# Altium PCB SonRegülatorPCB.PcbDoc
Units mm, origin at the board's own origin, x right, y up, seen from the top; angles counter-clockwise.
Board outline 50.2 x 29.92 mm, 2 copper layers (Top Layer, Bottom Layer); 4 components, 6 nets, 18 pads, 0 vias.
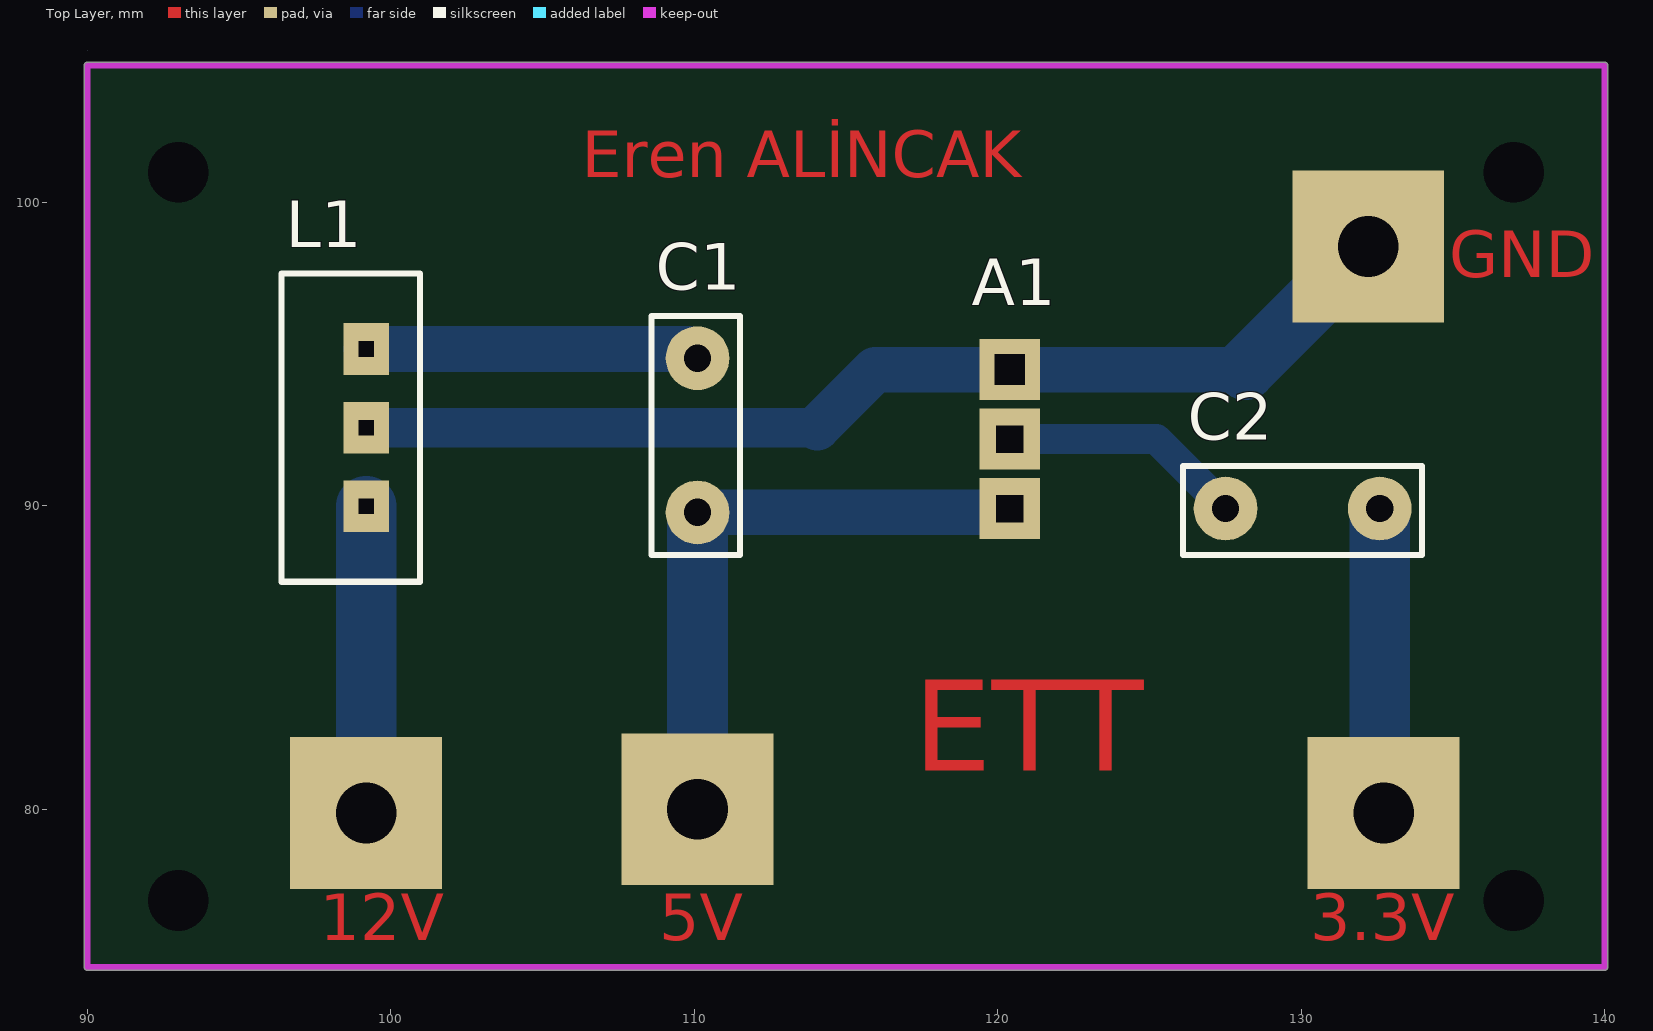
[diagram p0: Top Layer view]
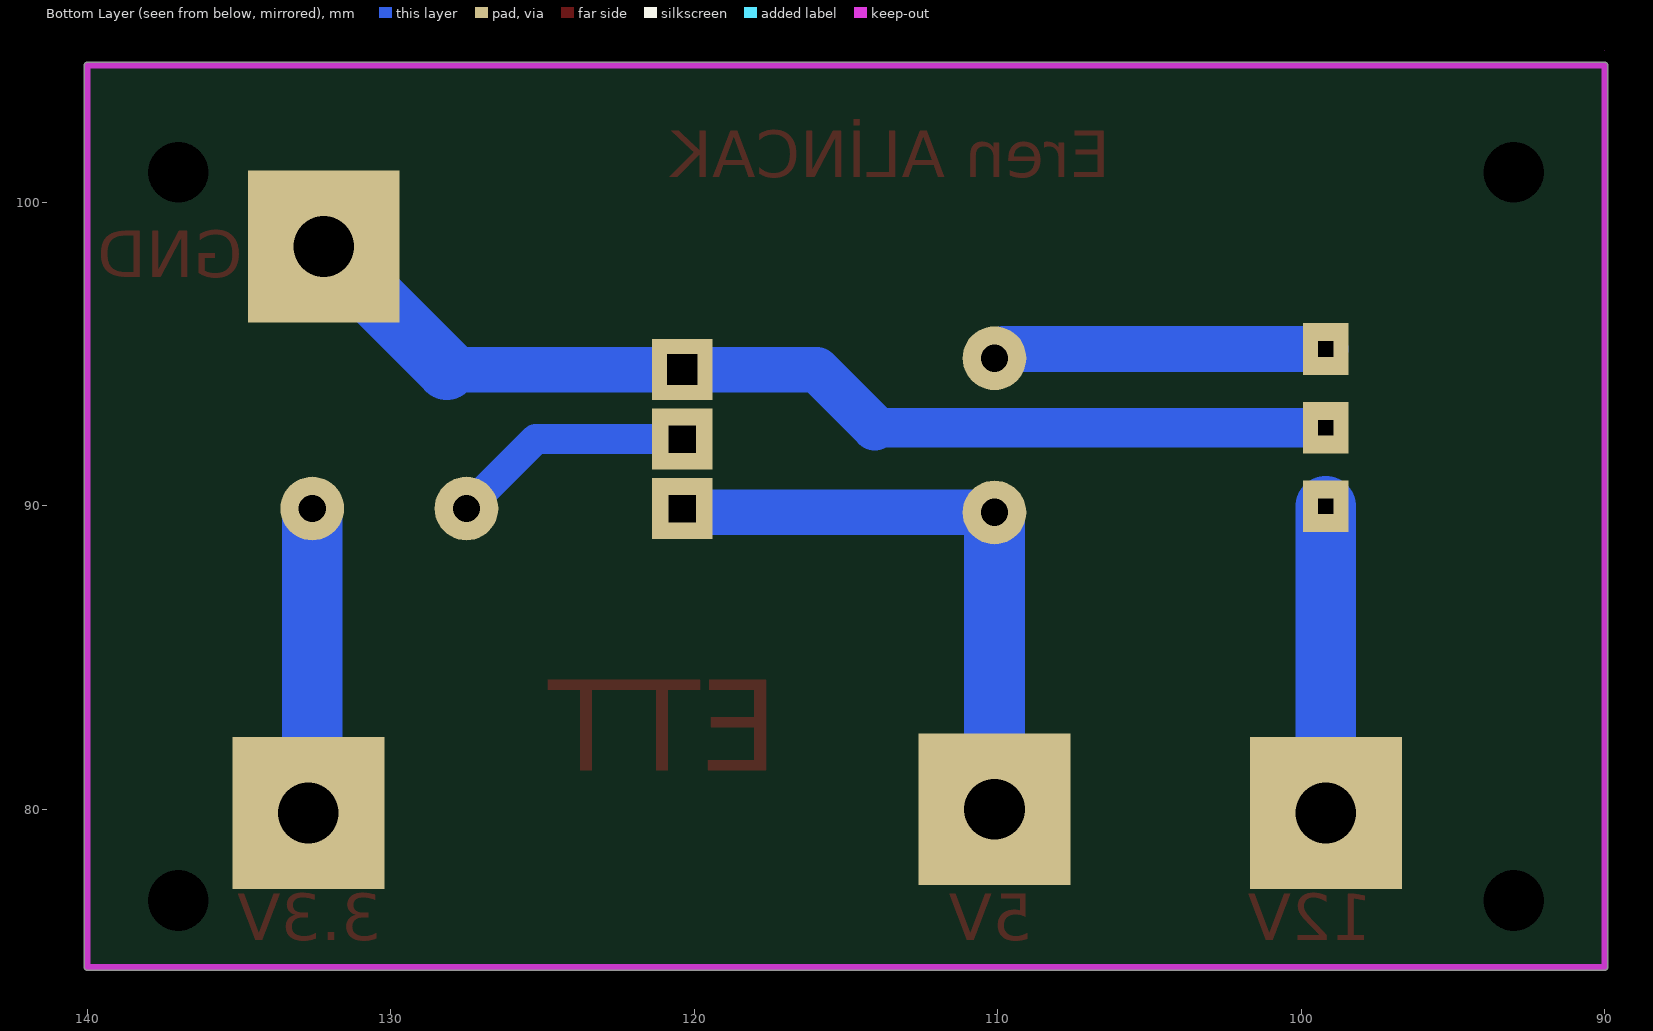
[diagram p1: Bottom Layer view, seen from below]
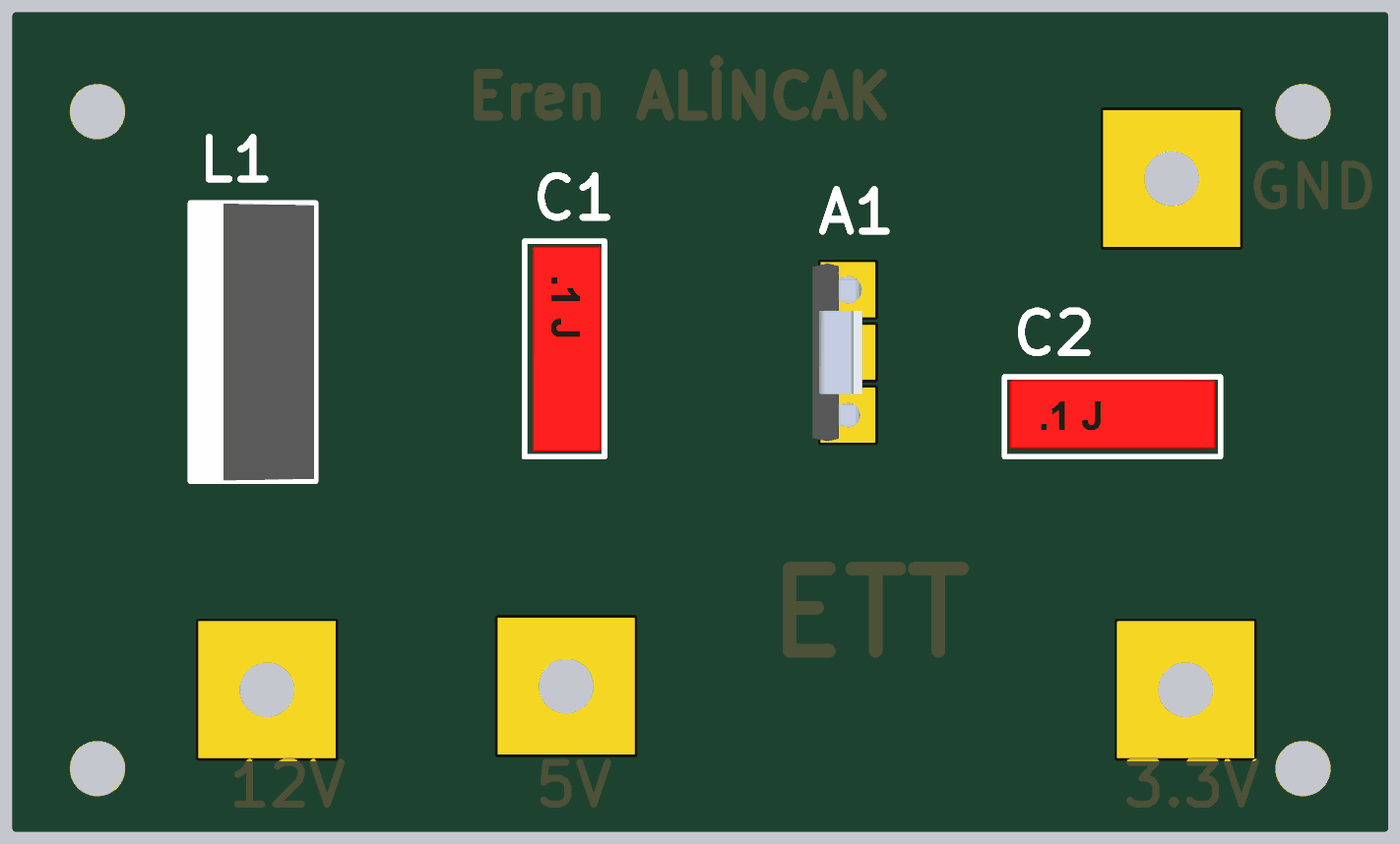
[diagram p2: 3D render of the assembled board from above, using the file's embedded part models]

## Layer stack, top to bottom
Top Solder: solder mask 0.0102, Solder Resist, Dk 3.5
Top Layer: signal copper 0.0356
Dielectric 1: dielectric 0.32, FR-4, Dk 4.8
Bottom Layer: signal copper 0.0356
Bottom Solder: solder mask 0.0102, Solder Resist, Dk 3.5

## Board outline
89.9,74.803 ccw(c90,74.803) 90,74.703 140,74.703 ccw(c140,74.803) 140.1,74.803 140.1,104.521 ccw(c140,104.521) 140,104.621 90,104.621 ccw(c90,104.521) 89.9,104.521
cut-out: 90,105

## Design rules (kind name [scope] priority, off if disabled: settings)
Clearance [All] p1: gap=0.254 ignorepadtopadclearanceinfootprint=FALSE except(0: Arc-Hole Track-Hole SMDPad-Hole THPad-Hole Via-Hole Fill-Hole Poly-Hole Region-Hole Text-Hole)
PolygonConnect [All] p1: connectstyle=Relief reliefconductorwidth=0.254 reliefentries=4 polygonreliefangle="90 Angle" airgapwidth=0.254
RoutingVias [All] p1: holewidth=0.711 width=1.27 viastyle="Through Hole" minholewidth=0.711 minwidth=1.27 maxholewidth=0.711 maxwidth=1.27
SolderMaskExpansion [All] p1: expansion=0.102
Width [All] p1: maxlimit=1000 minlimit=0.254 preferedwidth=1
30 further rules are at their usual default settings.

## Components (designator, comment, footprint, x,y, rotation, side; value= is the part's Value field where it differs from the comment)
A1 "AMSRegülatör" AMS1117-3,3 120.396,92.206 r270 top
C1 "Cap" Cap1 110.109,94.869 r270 top
C2 "Cap" Cap1 127.508,89.916 r0 top
L1 "LMRegülatör" LM7805 99.187,92.583 r90 top

## Footprints (in the part's own frame and the unit in brackets; to place one, negate y for a bottom-side part, rotate by r counter-clockwise, add the part's x,y. Pads: shape width x height; smd on the part's side, far side on the other; paste and mask are expansions set on the pad)
AMS1117-3,3 [mm]
  rect 2x2 hole 0.89 square: +(2.29,0) -(0,0)
  rect 2x2 hole 1 square: GND(-2.29,0)
  body extent -3.25,-1.3 3.25,0.51, height 6.1
Cap1 [mm] "100nF"
  round 2.1 hole 0.9: 1(0,0) 2(5.08,0)
  silkscreen extent -1.4,-1.52 6.48,1.4, body extent -1.21,-1.23 6.29,1.27, height 8.6
LM7805 [mm]
  rect 1.7x1.5 hole 0.5 square: +(-2.59,0) -(2.59,0) GND(0,0)
  silkscreen extent -5.08,-1.78 5.08,2.79, body extent -5.08,-1.71 5.08,2.86, height 22.34

## Part data
A1: library part AMS1117-3.3, "Crimper, Wire Special For 16740", Manufacturer="Advanced Monolithic Systems", Manufacturer Part Number=AMS1117-3.3, Pricing 1="1=0.1869, 10=0.135, 30=0.1256, 100=0.1163, 500=0.11, 1000=0.109, 1=0.1712, 10=0.1236, 30=0.115, 100=0.1065, 500=0.1008, 1000=0.0998, 1=0.8475, 10=0.612, 30=0.5697, 100=0.5272, 500=0.499, 1000=0.4943, 1=0.8153, 10=0.5888, 30=0.548, 100=0.5071, 500=0.48, 1000=0.4755, 1=0.1082, 10=0.0781, 30=0.0727, 100=0.0673, 500=0.0637, 1000=0.0631, 1=0.096, 10=0.0693, 30=0.0645, 100=0.0597, 500=0.0565, 1000=0.056, 1=0.9316, 10=0.6727, 30=0.6261, 100=0.5795, 500=0.5485, 1000=0.5433, 1=12.8319, 10=9.2663, 30=8.6249, 100=7.9818, 500=7.5548, 1000=7.4834, 1=0.5157, 10=0.3724, 30=0.3466, 100=0.3208, 500=0.3036, 1000=0.3008, 1=9.0461, 10=6.5324, 30=6.0803, 100=5.6269, 500=5.3259, 1000=5.2756, 1=1.181, 10=0.8528, 30=0.7938, 100=0.7346, 500=0.6953, 1000=0.6887, 1=0.1699, 10=0.1227, 30=0.1142, 100=0.1057, 500=0.1, 1000=0.0991, 1=0.12, 10=0.08666, 30=0.08066, 100=0.07465, 500=0.07065, 1000=0.06998 (AUD)", Stock 1=596858, Supplier 1=LCSC
C1 C2: library part R82DC3100DQ50J, "CAPACITOR POLY FILM FILM 0.1UF, 5%, 63V,", Capacitance=100nF, Case/Package=Radial, Dielectric=PET, Manufacturer=KEMET, Max Operating Temperature=105°C, Min Operating Temperature=-55°C, Package Quantity=3500, Tolerance=5%, Voltage=63V, Voltage Rating (AC)=40V, ComponentLink1Description=http://uk.rs-online.com/webdocs/1515/0900766b815154ac.pdf?src-supplier=RSComponents, ComponentLink1URL=http://uk.rs-online.com/webdocs/1515/0900766b815154ac.pdf?src-supplier=RSComponents, ComponentLink2Description=https://www.verical.com/server-webapp/html/getDatasheet?partID=151946&src-supplier=Verical, ComponentLink2URL=https://www.verical.com/server-webapp/html/getDatasheet?partID=151946&src-supplier=Verical, ComponentLink3Description=http://www.mouser.com/ds/2/212/KEM_F3101_R82-1103738.pdf?src-supplier=Mouser, ComponentLink3URL=http://www.mouser.com/ds/2/212/KEM_F3101_R82-1103738.pdf?src-supplier=Mouser, ComponentLink4Description=https://www.alliedelec.com/m/d/c7abfacc3ab5460f71cee4e24a650bb0.pdf?src-supplier=Allied+Electronics, ComponentLink4URL=https://www.alliedelec.com/m/d/c7abfacc3ab5460f71cee4e24a650bb0.pdf?src-supplier=Allied+Electronics, ComponentLink5Description=http://www.farnell.com/datasheets/1831763.pdf?src-supplier=Element14, ComponentLink5URL=http://www.farnell.com/datasheets/1831763.pdf?src-supplier=Element14, Depth=2.5mm, Dielectric Material=PET, Dissipation Factor=80%, Height=6.5mm, Height - Seated (Max)=0.26inch, Lead Diameter=0.5mm, Lead Pitch=5mm, Length=7.2mm, Life (Hours)=2000Hour, Manufacturer Part Number=R82DC3100DQ50J, Mount="Through Hole", Number of Pins=2, Packaging="Tape and Reel", Pricing 1="1=0.31, 10=0.211, 100=0.1196, 500=0.08446, 1000=0.0739 (USD)", Radiation Hardening=No, REACH SVHC="No SVHC", Stock 1=63956, Supplier 1=Digi-Key, Termination=Radial, Type="General Purpose", Voltage Rating=63V, Voltage Rating (DC)=63V, Width=0.098inch
L1: library part LM7805CT/NOPB, "Series 3-Terminal Positive Regulators", Case/Package=TO-220, Dropout Voltage=2V, Manufacturer="Texas Instruments", Max Input Voltage=35V, Max Operating Temperature=125°C, Max Output Current=1A, Min Input Voltage=10V, Min Operating Temperature=0°C, Output Voltage=5V, Output Voltage Accuracy=2%, Package Quantity=45, Quiescent Current=8mA, Accuracy=2%, ComponentLink1Description=http://www.jameco.com/Jameco/Products/ProdDS/902071.pdf?src-supplier=Jameco, ComponentLink1URL=http://www.jameco.com/Jameco/Products/ProdDS/902071.pdf?src-supplier=Jameco, ComponentLink2Description=http://www.ti.com/lit/ds/symlink/lm7805c.pdf?src-supplier=Digi-Key, ComponentLink2URL=http://www.ti.com/lit/ds/symlink/lm7805c.pdf?src-supplier=Digi-Key, ComponentLink3Description=http://www.ti.com/general/docs/lit/getliterature.tsp?genericPartNumber=LM7815C&&fileType=pdf&src-supplier=Avnet, ComponentLink3URL=http://www.ti.com/general/docs/lit/getliterature.tsp?genericPartNumber=LM7815C&&fileType=pdf&src-supplier=Avnet, Height=8.89mm, Lead Free="Contains Lead", Length=10.16mm, Manufacturer Part Number=LM7805CT/NOPB, Mount="Through Hole", Number of Outputs=1, Number of Pins=3, Number of Regulators=1, Output Current=1A, Output Type=Fixed, Packaging=Rail/Tube, Polarity=Positive, Pricing 1="1=1.54, 10=1.381, 25=1.3024, 100=1.042, 250=0.91176, 500=0.8857, 1000=0.70335, 2500=0.6773, 5000=0.65125 (USD)", Radiation Hardening=No, Stock 1=25093, Supplier 1=Digi-Key, Width=4.7mm

## Free pads (board coordinates)
  rect 5x5 hole 2: "3.3V OUTPUT"(132.715,79.883) "5V OUTPUT"(110.109,80.01) "12V INPUT"(99.187,79.883) GND(132.207,98.552)
  round 1.524 hole 2: 10(137,101) 12(93,77) 13(137,77) 14(93,101)

## Nets (pads, with @x,y where several pads share a name; then routed paths per layer and width w, separated by ;. In a path a pad name is that pad's centre, name@x,y a point inside that pad or via, vN(x,y) a via of type N, cw(c..) or ccw(c..) an arc to the next point about the centre after c; other vN are vias at no path point)
3.3V: A1.- C2.1 | length 8.1
  Bottom Layer w1: A1.- 125.218,92.206 C2.1
"3.3V Output": "pad.3.3V OUTPUT" C2.2 | length 10.1
  Top Layer w1: 132.588,80.01 132.715,79.883
  Bottom Layer w2: 132.588,80.01 C2.2
5V: C1.1 L1.- | length 11
  Top Layer w1: C1.1@109.805,95.173 C1.1
  Bottom Layer w1.5: L1.- C1.1@109.805,95.173
"5V Output": "pad.5V OUTPUT" A1.+ C1.2 | length 20.1
  Top Layer w1: A1.+@120.269,89.789 A1.+
  Bottom Layer w1.5: C1.2 A1.+@120.269,89.789
  Bottom Layer w2: 110.109,80.01 C1.2
"12V Input": "pad.12V INPUT" L1.+ | length 10.1
  Bottom Layer w2: 99.187,79.883 L1.+
GND: A1.GND L1.GND pad.GND | length 35.5
  Bottom Layer w1.3: L1.GND 114.046,92.583
  Bottom Layer w1.5: 114.046,92.583 115.959,94.496 A1.GND 128.151,94.496
  Bottom Layer w2: 128.151,94.496 pad.GND

## Keep-outs
Keep-Out Layer:
  lines w0.2: 90,74.803 140,74.803 140,104.521 90,104.521 90,74.803
  lines w1.2: 25.4,25.4 25.4,127 177.8,127 177.8,25.4 25.4,25.4

## Other copper
Top Layer:
  text "Eren ALİNCAK" at 106.299,100.838 h1.52
  text "GND" at 134.874,97.536 h1.52
  text "ETT" at 117.221,81.28 h3
  text "12V" at 97.663,75.692 h1.52
  text "5V" at 108.839,75.692 h1.52
  text "3.3V" at 130.302,75.692 h1.52